# EAGLE board Control_Board (EAGLE 6.6.0)
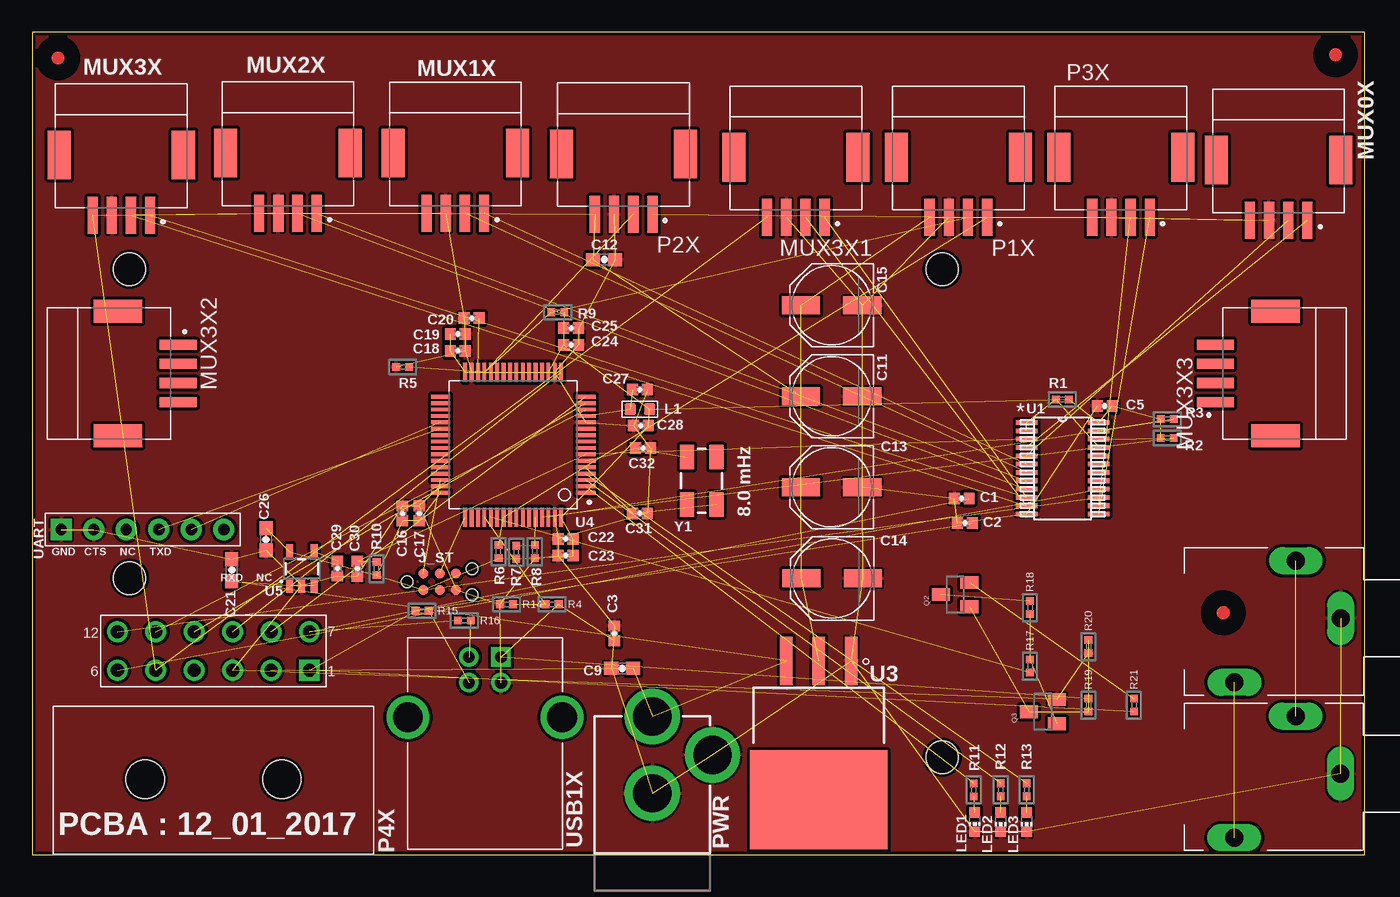
[diagram p0: board, top side]
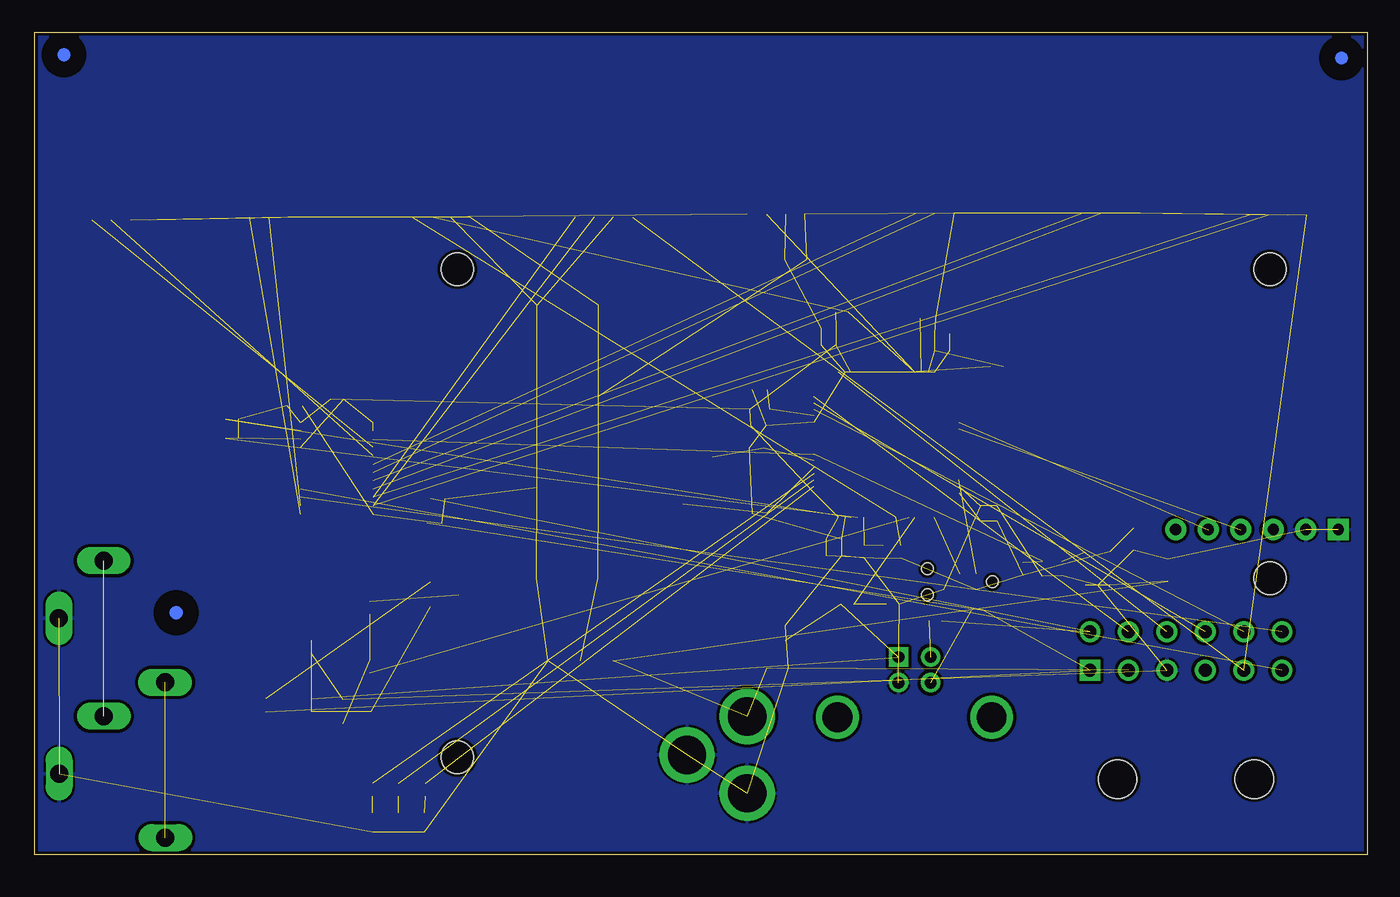
[diagram p1: board, bottom side, seen from below]

Size 104.14 x 64.26 mm. Coordinates in mm from the lower left corner, seen from the top.
Outline: 104.14,0 104.14,64.26 0,64.26 0,0 104.14,0
Copper layers (1*16): Top 0.035mm / dielectric 1.5mm / Bottom 0.035mm
Design rules "PatternAgents_7mil": minimum track width 7mil, minimum drill 14mil, track to track 7mil, track to pad 7mil, pad to pad 7mil, via to via 7mil, smd to smd 7mil, copper to edge 7mil, drill to drill 7mil, minimum pad ring 12mil, minimum via ring 10mil, stop-mask expansion 4mil, vias tented up to drill 25mil, thermal gap 7mil
Net classes: 1 vcc: width 0.254 mm
Holes 2.54 mm at 71.12,45.72 7.62,45.72 71.12,7.62 7.62,21.59

## Footprints (pad centres in the part's own frame; a part is rotated, then mirrored left to right if it is on the bottom)
0402-CAP = smd 0.85 x 0.9: 1 -0.58,0; 2 0.58,0
0603-CAP = smd 1.1 x 1: 1 -0.85,0; 2 0.85,0
PANASONIC_D = smd 3 x 1.4: + 2.4,0; - -2.4,0
TC2030-MCP-NL = smd 0.787 x 0.787: 1 1.27,-0.635; 2 1.27,0.635; 3 2.54,-0.635; 4 2.54,0.635; 5 3.81,-0.635; 6 3.81,0.635 | hole 0.889: 0,0; 5.08,-1.016; 5.08,1.016
L0603 = smd 0.889 x 0.889: 1 -0.762,0; 2 0.762,0
CHIP-LED0603 = smd 0.8 x 0.8: A 0,-0.75; C 0,0.75
MOLEX_502585-0470 = smd 0.8 x 2.9: 1 -2.25,0; 2 -0.75,0; 3 0.75,0; 4 2.25,0 | smd 1.8 x 3.8: P1 -4.85,-4.7; P2 4.85,-4.7
MOLEX_44428-1201 = drill 1.02 square: 1 7.5,5.065 | drill 1.02: 2 4.5,5.065; 3 1.5,5.065; 4 -1.5,5.065; 5 -4.5,5.065; 6 -7.5,5.065; 7 7.5,8.065; 8 4.5,8.065; 9 1.5,8.065; 10 -1.5,8.065; 11 -4.5,8.065; 12 -7.5,8.065 | hole 3: -5.34,-3.465; 5.34,-3.465
SJ1-351XN = drill 1.4 long: 1 0.8,0; 2 4.3,-4.5; 3 9.1,5
POWER_JACK_PTH = drill 2.997 pad 4.318: GND 0,7.7; GNDBREAK 4.7,10.7; PWR 0,13.7
SOT23 = smd 1 x 1.4: 1 -0.95,-1.1; 2 0.95,-1.1; 3 0,1.1
EIA-0402 = smd 0.6 x 0.6: 1 -0.508,0; 2 0.508,0
PW24 = smd 1.676 x 0.356: 1 -2.819,3.575; 2 -2.819,2.925; 3 -2.819,2.275; 4 -2.819,1.625; 5 -2.819,0.975; 6 -2.819,0.325; 7 -2.819,-0.325; 8 -2.819,-0.975; 9 -2.819,-1.625; 10 -2.819,-2.275; 11 -2.819,-2.925; 12 -2.819,-3.575; 13 2.819,-3.575; 14 2.819,-2.925; 15 2.819,-2.275; 16 2.819,-1.625; 17 2.819,-0.975; 18 2.819,-0.325; 19 2.819,0.325; 20 2.819,0.975; 21 2.819,1.625; 22 2.819,2.275; 23 2.819,2.925; 24 2.819,3.575
TO254P1524X483-4N = smd 3.8 x 1: 1 -6.4,2.54; 2 -6.4,0; 3 -6.4,-2.54 | smd 7.75 x 10.75: TAB 4.45,0
QFP50P1200X1200X160-64N = smd 1.5 x 0.3: 1 -5.67,3.75; 2 -5.67,3.25; 3 -5.67,2.75; 4 -5.67,2.25; 5 -5.67,1.75; 6 -5.67,1.25; 7 -5.67,0.75; 8 -5.67,0.25; 9 -5.67,-0.25; 10 -5.67,-0.75; 11 -5.67,-1.25; 12 -5.67,-1.75; 13 -5.67,-2.25; 14 -5.67,-2.75; 15 -5.67,-3.25; 16 -5.67,-3.75; 33 5.67,-3.75; 34 5.67,-3.25; 35 5.67,-2.75; 36 5.67,-2.25; 37 5.67,-1.75; 38 5.67,-1.25; 39 5.67,-0.75; 40 5.67,-0.25; 41 5.67,0.25; 42 5.67,0.75; 43 5.67,1.25; 44 5.67,1.75; 45 5.67,2.25; 46 5.67,2.75; 47 5.67,3.25; 48 5.67,3.75 | smd 0.3 x 1.5: 17 -3.75,-5.67; 18 -3.25,-5.67; 19 -2.75,-5.67; 20 -2.25,-5.67; 21 -1.75,-5.67; 22 -1.25,-5.67; 23 -0.75,-5.67; 24 -0.25,-5.67; 25 0.25,-5.67; 26 0.75,-5.67; 27 1.25,-5.67; 28 1.75,-5.67; 29 2.25,-5.67; 30 2.75,-5.67; 31 3.25,-5.67; 32 3.75,-5.67; 49 3.75,5.67; 50 3.25,5.67; 51 2.75,5.67; 52 2.25,5.67; 53 1.75,5.67; 54 1.25,5.67; 55 0.75,5.67; 56 0.25,5.67; 57 -0.25,5.67; 58 -0.75,5.67; 59 -1.25,5.67; 60 -1.75,5.67; 61 -2.25,5.67; 62 -2.75,5.67; 63 -3.25,5.67; 64 -3.75,5.67
SOT23-5 = smd 0.55 x 1.2: 1 -0.95,-1.3; 2 0,-1.3; 3 0.95,-1.3; 4 0.95,1.3; 5 -0.95,1.3
H6-2.54 = drill 0.889 pad 1.651 square: 1 0,6.35 | drill 0.889 pad 1.651: 2 0,3.81; 3 0,1.27; 4 0,-1.27; 5 0,-3.81; 6 0,-6.35
OST_USB-B1HSB6 = drill 0.92 square: 1 1.25,4.71 | drill 0.92: 2 -1.25,4.71; 3 -1.25,2.71; 4 1.25,2.71 | drill 2.33: P1 -6.02,0; P2 6.02,0
CRYSTAL-SMD-5X3 = smd 1.9 x 1.1: 1 -1.85,-1.15; 2 1.85,-1.15; 3 1.85,1.15; 4 -1.85,1.15

## Placement (x,y rotation side)
C1  47pF  [0402-CAP]  72.64,27.81 180 top
C2  47pF  [0402-CAP]  72.9,25.91 180 top
C3  100nF  [0402-CAP]  45.5,17.28 90 top
C5  100nF  [0402-CAP]  83.82,35.05 180 top
C9  10uF  [0603-CAP]  46.12,14.55 180 top
C11  47u  [PANASONIC_D]  62.48,35.81 180 top
C12  10uF  [0603-CAP]  44.7,46.48 0 top
C13  47u  [PANASONIC_D]  62.48,28.7 180 top
C14  47u  [PANASONIC_D]  62.53,21.58 180 top
C15  47u  [PANASONIC_D]  62.48,42.93 180 top
C16  100nF  [0402-CAP]  28.96,26.66 90 top
C17  4.7uF  [0402-CAP]  30.27,26.66 90 top
C18  4.7uF  [0402-CAP]  33.27,39.36 0 top
C19  100nF  [0402-CAP]  33.27,40.67 0 top
C20  2.2uF  [0402-CAP]  34.36,41.91 180 top
C21  10uF  [0603-CAP]  15.61,22.22 90 top
C22  4.7uF  [0402-CAP]  41.7,24.67 180 top
C23  100nF  [0402-CAP]  41.7,23.36 180 top
C24  100nF  [0402-CAP]  42.13,39.82 0 top
C25  4.7uF  [0402-CAP]  42.13,41.13 0 top
C26  10uF  [0603-CAP]  18.29,24.64 270 top
C27  1uF  [0402-CAP]  47.5,36.32 0 top
C28  10nF  [0402-CAP]  47.58,33.51 180 top
C29  470pF  [0402-CAP]  23.88,22.35 270 top
C30  100nF  [0402-CAP]  25.42,22.34 270 top
C31  33pF  [0402-CAP]  47.5,26.67 180 top
C32  33pF  [0402-CAP]  47.75,31.75 180 top
J_ST  [TC2030-MCP-NL]  29.31,21.32 0 top
L1  120OHM-500MA  [L0603]  47.5,34.8 0 top
LED1  [CHIP-LED0603]  73.67,2.55 180 top
LED2  [CHIP-LED0603]  75.69,2.54 180 top
LED3  [CHIP-LED0603]  77.72,2.54 180 top
MUX0X  502585-0470  [MOLEX_502585-0470]  97.41,49.55 180 top
MUX1X  502585-0470  [MOLEX_502585-0470]  33.08,50.1 180 top
MUX2X  502585-0470  [MOLEX_502585-0470]  20,50.11 180 top
MUX3X  502585-0470  [MOLEX_502585-0470]  6.99,49.95 180 top
MUX3X1  502585-0470  [MOLEX_502585-0470]  59.69,49.78 180 top
MUX3X2  502585-0470  [MOLEX_502585-0470]  11.43,37.59 270 top
MUX3X3  502585-0470  [MOLEX_502585-0470]  92.46,37.59 90 top
P1X  502585-0470  [MOLEX_502585-0470]  72.39,49.78 180 top
P2X  502585-0470  [MOLEX_502585-0470]  46.23,50.04 180 top
P3X  502585-0470  [MOLEX_502585-0470]  85.09,49.78 180 top
P4X  44428-1201  [MOLEX_44428-1201]  14.18,9.35 0 top
PJ1  SJ1-3513N  [SJ1-351XN]  103.04,6.33 180 top
PJ2  SJ1-3513N  [SJ1-351XN]  103.06,18.47 180 top
PWR  POWER_JACKPTH  [POWER_JACK_PTH]  48.47,-2.9 0 top
Q2  [SOT23]  72.14,20.32 90 top
Q3  [SOT23]  78.99,11.18 90 top
R1  10k  [EIA-0402]  80.52,35.56 0 top
R2  4.7k  [EIA-0402]  88.7,32.55 0 top
R3  4.7k  [EIA-0402]  88.71,34.02 0 top
R4  1K5  [EIA-0402]  40.64,19.56 0 top
R5  DNP  [EIA-0402]  28.96,38.1 0 top
R6  4.7k  [EIA-0402]  36.45,23.67 90 top
R7  DNP  [EIA-0402]  37.85,23.62 270 top
R8  10k  [EIA-0402]  39.29,23.68 90 top
R9  4.7k  [EIA-0402]  41.08,42.38 180 top
R10  10k  [EIA-0402]  26.92,22.35 270 top
R11  470  [EIA-0402]  73.59,5.06 270 top
R12  470  [EIA-0402]  75.69,5.08 270 top
R13  470  [EIA-0402]  77.72,5.08 270 top
R14  1K5  [EIA-0402]  37.08,19.56 0 top
R15  22  [EIA-0402]  30.48,19.05 0 top
R16  22  [EIA-0402]  33.78,18.29 0 top
R17  1k  [EIA-0402]  77.98,14.73 90 top
R18  47K  [EIA-0402]  77.98,19.3 90 top
R19  10K  [EIA-0402]  82.55,11.68 90 top
R20  36k  [EIA-0402]  82.55,16.26 90 top
R21  1.5K  [EIA-0402]  86.11,11.68 90 top
U1  PCA9548A_PW_24  [PW24]  80.53,30.18 0 top
U3  LMS1585AIS-3.3/NOPB-ND  [TO254P1524X483-4N]  61.48,8.74 270 top
U4  STM32F401RET6  [QFP50P1200X1200X160-64N]  37.6,32.02 180 top
U5  3.3V/150mA  [SOT23-5]  21.08,22.35 0 top
U$1  [CIRCLE-1MM-3R]  2.03,62.23 0 top
U$2  [CIRCLE-1MM-3R]  101.85,62.48 0 top
U$3  [CIRCLE-1MM-3R]  93.09,18.89 0 top
UART  6p-2.54  [H6-2.54]  8.64,25.4 90 top
USB1X  USB-B1HSB6  [OST_USB-B1HSB6]  35.39,10.73 0 top
Y1  8MHz  [CRYSTAL-SMD-5X3]  52.32,29.21 90 top

## Library data of the parts
C1-C3 C5 C9 C12 C16-C32 R1-R21 = PatternAgents-ProtoPads
C11 C13-C15 = SparkFun-Capacitors
J_ST = tag-connect
L1 = Seeed-Inductor-2016; MPN: BLM18AG121SN1D
LED1-LED3 = led
MUX0X MUX1X MUX2X MUX3X MUX3X1-MUX3X3 P1X P2X P3X = 502585-0470; AVAILABILITY: Good; DESCRIPTION: 1.50mm Pitch CLIK-Mate™ Wire-to-Board PCB Receptacle, Single Row, Right Angle, 4 Circuits; MF: Molex; MP: 502585-0470; PACKAGE: None; PRICE: 0.44 USD
P4X = 44428-1201; AVAILABILITY: Good; DESCRIPTION: Conn Wire to Board HDR 12 POS 3mm Solder RA Thru-Hole Micro-Fit 3.0 BMI? Tray; MF: Molex; MP: 44428-1201; PACKAGE: None; PRICE: 2.39 USD
PJ1 PJ2 = audio_mux
PWR = SparkFun-Connectors; PROD_ID: CONN-08197
Q2 Q3 Y1 = SparkFun2
U1 = PCA9548A_PW_124; DATASHEETURL: http://www.ti.com/lit/gpn/PCA9548A; DESCRIPTION: 8-Channel I2C Switch With Reset; FAMILY_NAME: I2C MULTIPLEXER, SWITCH; GENERIC_PART_NUMBER: PCA9548A; INDUSTRY_STD_PKG_TYPE: TSSOP; MANUFACTURER: Texas Instruments; MANUFACTURER_PART_NUMBER: pca9548a_pw_24; PACKAGE_DESIGNATOR: PW; PIN_COUNT: 24; VENDOR: Texas Instruments
U3 = TO254P1524X483-4N
U4 = STM32F401RET6; AVAILABILITY: Good; DESCRIPTION: MCU 32-Bit STM32 ARM Cortex M4 RISC 512KB Flash 1.8V/2.5V/3.3V 64-Pin LQFP Tray; MF: STMicroelectronics; MP: STM32F401RET6; PACKAGE: LQFP-64 STMicroelectronics; PRICE: 4.74 USD
U5 = SparkFun-PowerIC; PROD_ID: VREG-00822
U$1-U$3 = fiducial
UART = Seeed-Connector -2016; MPN: F185-1106A1BSYC1
USB1X = USB-B1HSB6; AVAILABILITY: Warning; DESCRIPTION: Conn Usb Type b r/a Black; MF: On Shore Technology; MP: USB-B1HSB6; PACKAGE: None; PRICE: 0.42 USD

## Nets
3V3: Q2.3 R18.2
3V3_EXT: C11.+ C12.1 C13.+ C14.+ C15.+ MUX0X.4 MUX1X.4 MUX2X.4 MUX3X1.4 MUX3X.4 P1X.4 P2X.4 P3X.4 P4X.5 U3.2
5V0: P4X.4
!RST: C30.1 R10.1 U1.3 U4.7
AUD_L: PJ1.2 PJ2.2
AUD_R: PJ1.3 PJ2.3
BOOT0: R7.1 R8.2 U4.60
BOOT1: R5.2 U4.28
CTS_UART1: U4.45
CTS_UART2: P4X.10 U4.15
DISCI: Q3.1 R17.2 R18.1
DISCO: Q2.1 Q3.3 R19.1 R20.2
DM: R16.2 USB1X.2
DP: R15.2 USB1X.3
DTX: UART.6
GND: C1.2 C2.2 C3.2 C5.2 C9.2 C11.- C12.2 C13.- C14.- C15.- C16.2 C17.2 C18.2 C19.2 C20.2 C21.2 C22.2 C23.2 C24.2 C25.2 C26.2 C27.2 C28.2 C29.2 C30.2 C31.1 C32.1 J_ST.5 LED1.C LED2.C LED3.C MUX0X.3 MUX1X.3 MUX2X.3 MUX3X1.3 MUX3X.3 P1X.3 P2X.3 P3X.3 P4X.3 PJ1.1 PJ2.1 PWR.GND PWR.GNDBREAK Q3.2 R5.1 R8.1 R14.1 R20.1 U1.12 U3.1 U4.12 U4.18 U4.31 U4.47 U4.63 U5.2 UART.1 UART.2 USB1X.4
I2C1_SCL: R2.2 U1.22 U4.61
I2C1_SDA: R3.2 U1.23 U4.62
I2C2_SCL: P1X.2 P2X.2 R9.2 U4.29
I2C2_SDA: P1X.1 P2X.1 R6.2 U4.55
LED1: LED1.A R11.2
LED2: LED2.A R12.2
LED3: LED3.A R13.2
LED_B: R13.1 U4.4
LED_G: R12.1 U4.3
LED_R: R11.1 U4.2
N$1: Q2.2 R21.2
N$7: C29.1 U5.4
OSC_IN: C31.2 U4.5 Y1.1
OSC_OUT: C32.2 U4.6 Y1.3
PA4: U4.20
PA5: U4.21
PA6: U4.22
PA7: U4.23
PA8: U4.41
PA15: U4.50
PB0: U4.26
PB1: U4.27
PB4: U4.56
PB5: U4.57
PB6: U4.58
PB7: U4.59
PB12: U4.33
PB13: U4.34
PB14: U4.35
PB15: U4.36
PC0: U4.8
PC1: U4.9
PC2: U4.10
PC3: U4.11
PC4: U4.24
PC5: U4.25
PC8: U4.39
PC9: U4.40
PC10: U4.51
PD2: U4.54
PUP: R1.1 U1.1 U1.2 U1.21
RTS_UART1: U4.44
RTS_UART2: P4X.11 U4.14
RXD_UART1: U4.42
RXD_UART2: P4X.8 U4.16
RXD_UART6: U4.38 UART.4
SC0: MUX0X.2 U1.5
SC1: MUX1X.2 U1.7
SC2: MUX2X.2 U1.9
SC3: MUX3X1.2 MUX3X.2 U1.11
SC4: P3X.2 U1.14
SC5: P4X.6 U1.16
SC6: U1.18
SC7: U1.20
SD0: MUX0X.1 U1.4
SD1: MUX1X.1 U1.6
SD2: MUX2X.1 U1.8
SD3: MUX3X1.1 MUX3X.1 U1.10
SD4: P3X.1 U1.13
SD5: P4X.12 U1.15
SD6: U1.17
SD7: U1.19
SWCLK_ST: J_ST.4 U4.49
SWDIO_ST: J_ST.2 U4.46
TXD_UART1: U4.43
TXD_UART2: P4X.9 U4.17
TXD_UART6: U4.37 UART.5
USB_DISC: R17.1 U4.53
USB_DM: C1.1 P4X.7 R16.1
USB_DP: C2.1 P4X.1 R15.1 R21.1
USB_PWREN: R4.1 R14.2 U4.52
USB_VBUS: C3.1 R4.2 R19.2 USB1X.1
VCAP: C20.1 U4.30
VDD: C5.1 C16.1 C17.1 C18.1 C19.1 C22.1 C23.1 C24.1 C25.1 C26.1 C28.1 J_ST.1 L1.2 R1.2 R2.1 R3.1 R6.1 R7.2 R9.1 R10.2 U1.24 U4.1 U4.19 U4.32 U4.48 U4.64 U5.5
VDDA: C27.1 L1.1 U4.13
VIN_DC: C9.1 C21.1 P4X.2 PWR.PWR U3.3 U5.1 U5.3
VSS(GND): J_ST.3
VXX: UART.3

## Tracks (layer width: path | path; a pad name or v marks a point on that pad's centre or on a via)
3V3  (1 unrouted)
3V3_EXT  (14 unrouted)
!RST  (3 unrouted)
AUD_L  (1 unrouted)
AUD_R  (1 unrouted)
BOOT0  (2 unrouted)
BOOT1  (1 unrouted)
CTS_UART2  (1 unrouted)
DISCI  (2 unrouted)
DISCO  (3 unrouted)
DM  (1 unrouted)
DP  (1 unrouted)
GND  (59 unrouted)
  pour Bottom (isolate 0.254, hatched): 0,0 0,64.26 104.14,64.26 104.14,0
  pour Top (isolate 0.254, hatched): 0,0 0,64.26 104.14,64.26 104.14,0
I2C1_SCL  (2 unrouted)
I2C1_SDA  (2 unrouted)
I2C2_SCL  (3 unrouted)
I2C2_SDA  (3 unrouted)
LED1  (1 unrouted)
LED2  (1 unrouted)
LED3  (1 unrouted)
LED_B  (1 unrouted)
LED_G  (1 unrouted)
LED_R  (1 unrouted)
N$1  (1 unrouted)
N$7  (1 unrouted)
OSC_IN  (2 unrouted)
OSC_OUT  (2 unrouted)
PUP  (3 unrouted)
RTS_UART2  (1 unrouted)
RXD_UART2  (1 unrouted)
RXD_UART6  (1 unrouted)
SC0  (1 unrouted)
SC1  (1 unrouted)
SC2  (1 unrouted)
SC3  (2 unrouted)
SC4  (1 unrouted)
SC5  (1 unrouted)
SD0  (1 unrouted)
SD1  (1 unrouted)
SD2  (1 unrouted)
SD3  (2 unrouted)
SD4  (1 unrouted)
SD5  (1 unrouted)
SWCLK_ST  (1 unrouted)
SWDIO_ST  (1 unrouted)
TXD_UART2  (1 unrouted)
TXD_UART6  (1 unrouted)
USB_DISC  (1 unrouted)
USB_DM  (2 unrouted)
USB_DP  (3 unrouted)
USB_PWREN  (2 unrouted)
USB_VBUS  (3 unrouted)
VCAP  (1 unrouted)
VDD  (26 unrouted)
VDDA  (2 unrouted)
VIN_DC  (6 unrouted)

## Text on the board
tPlace: 8.0 mHz | GND | CTS | NC | TXD | RXD | NC | PCBA : 12_01_2017